# Altium PCB pcb.PcbDoc
Units mm, origin at the board's own origin, x right, y up, seen from the top; angles counter-clockwise.
Board outline 90 x 60 mm, 2 copper layers (Top Layer, Bottom Layer); 63 components, 67 nets, 255 pads, 257 vias.
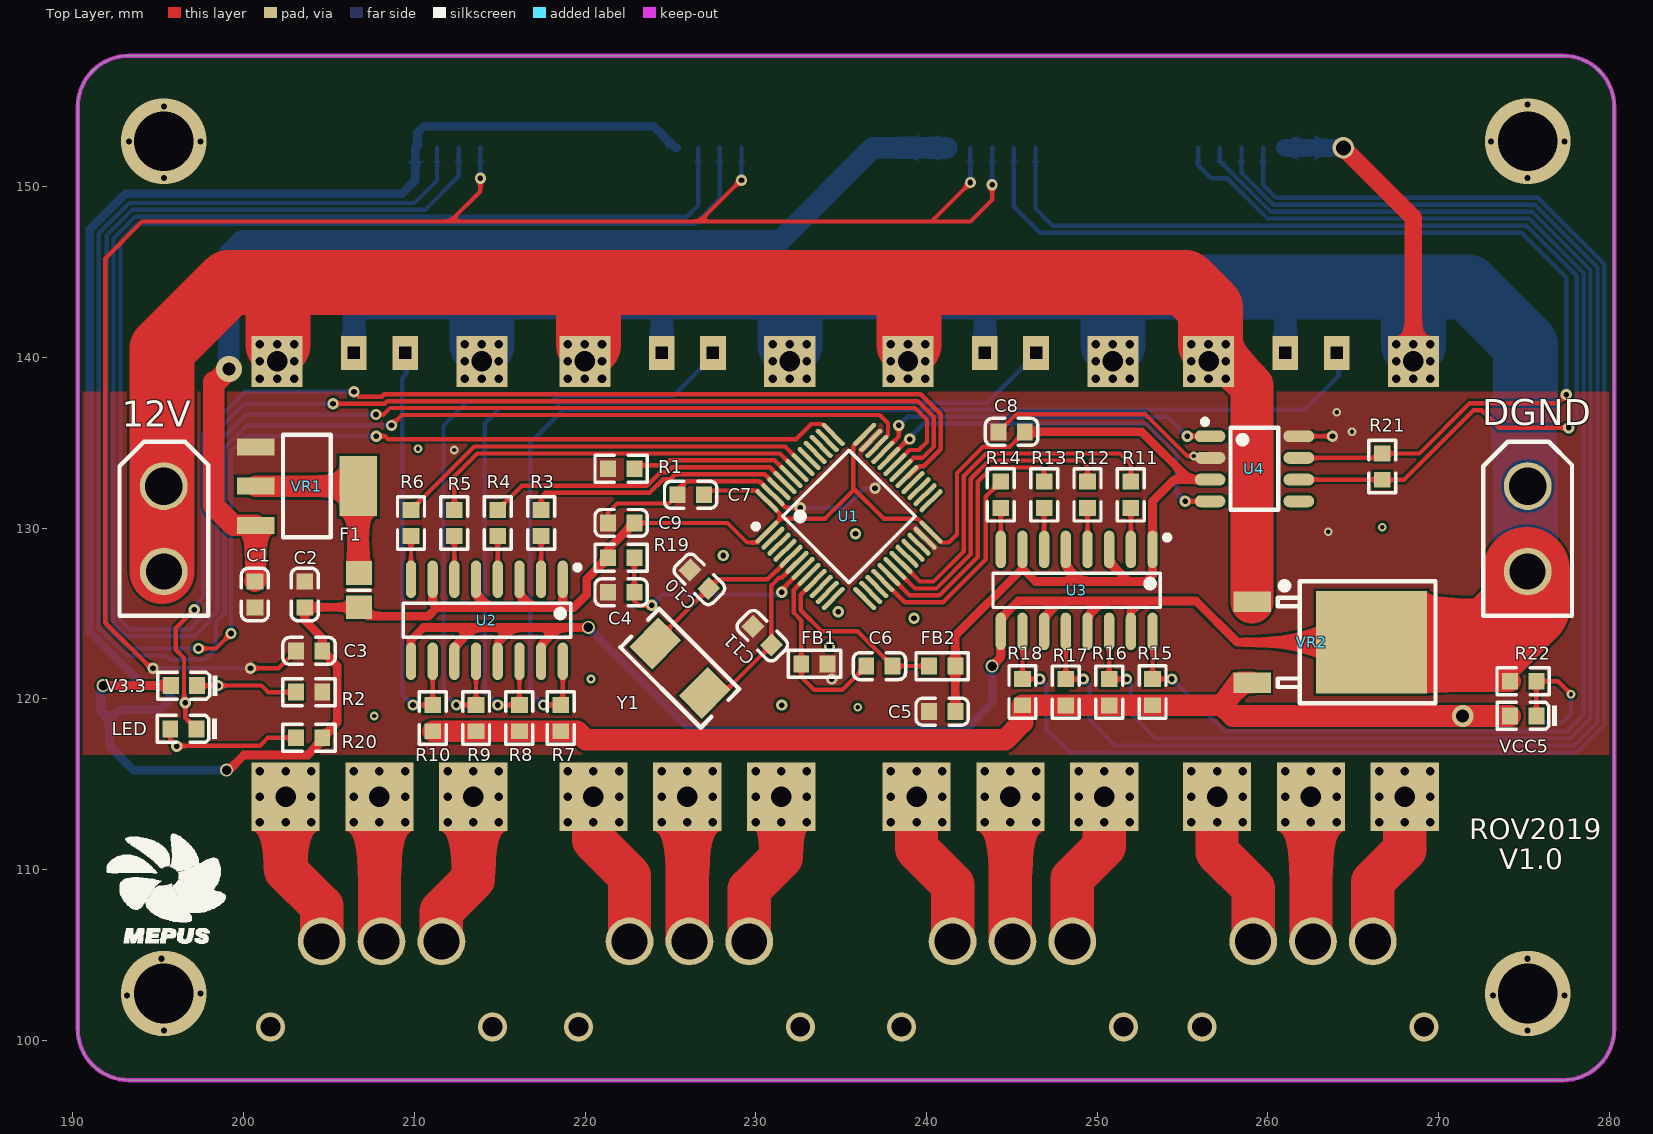
[diagram p0: Top Layer view]
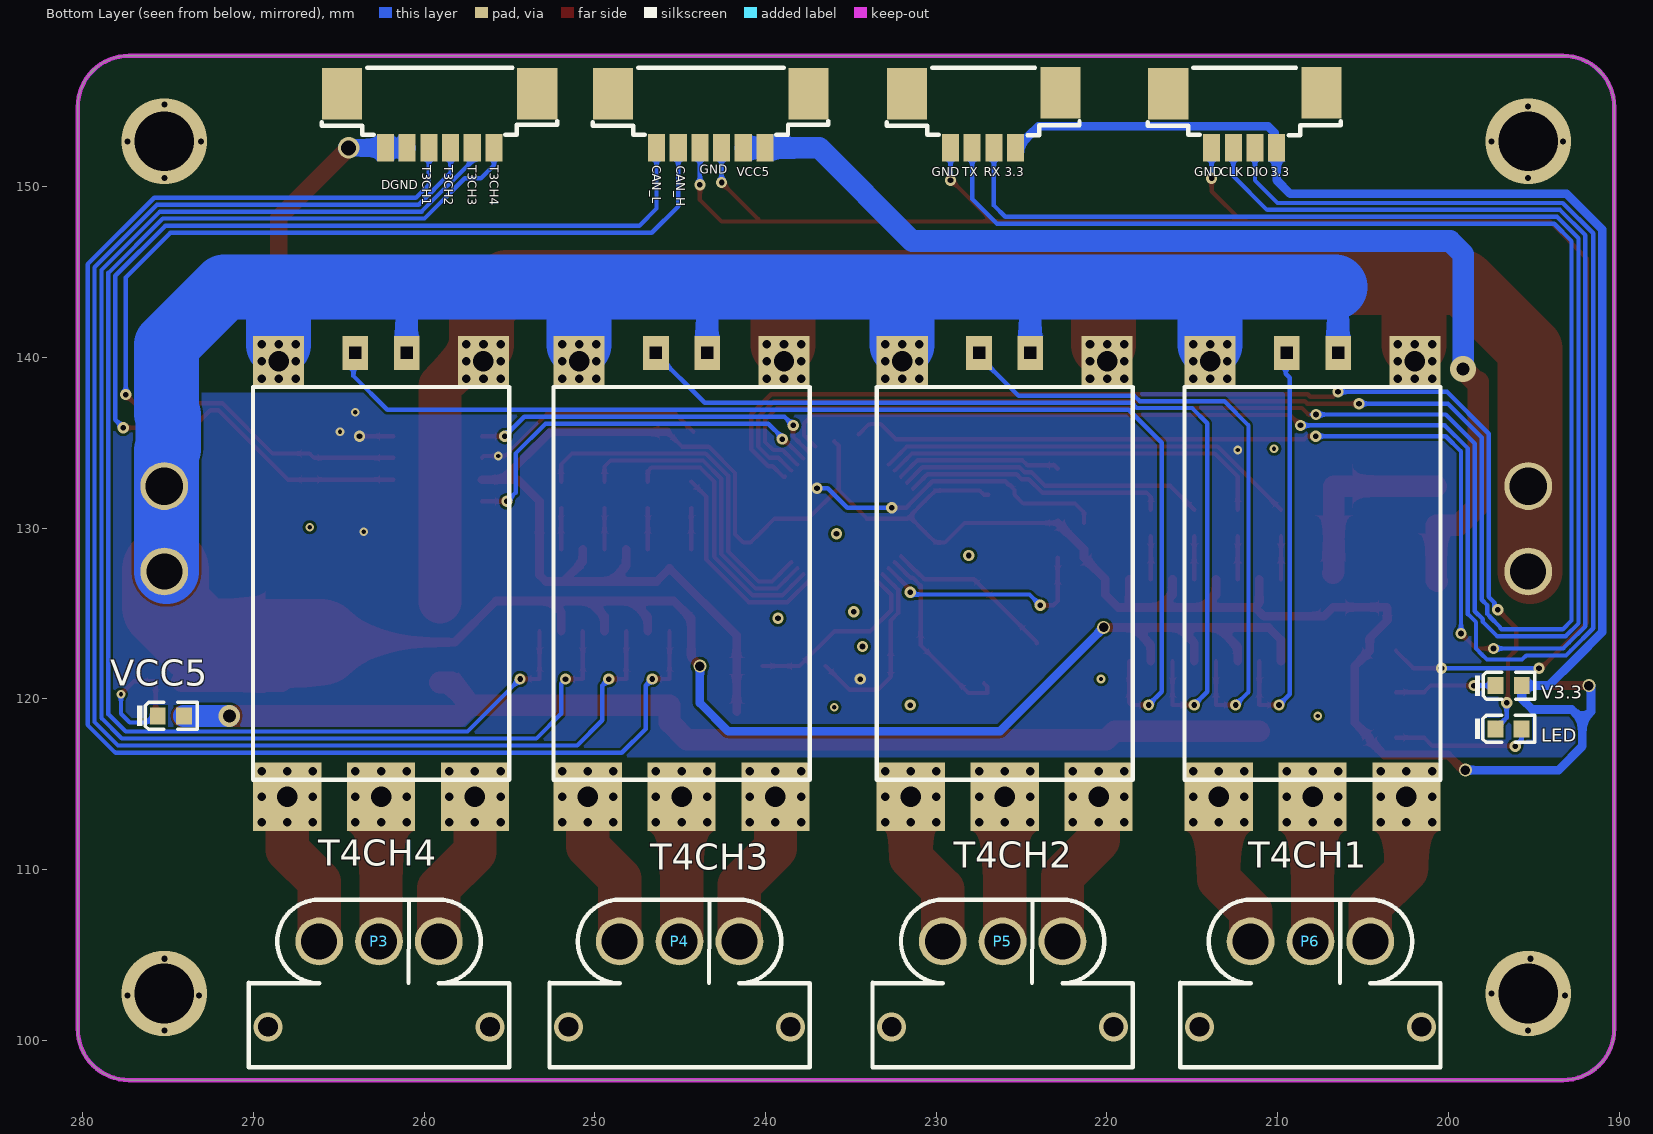
[diagram p1: Bottom Layer view, seen from below]
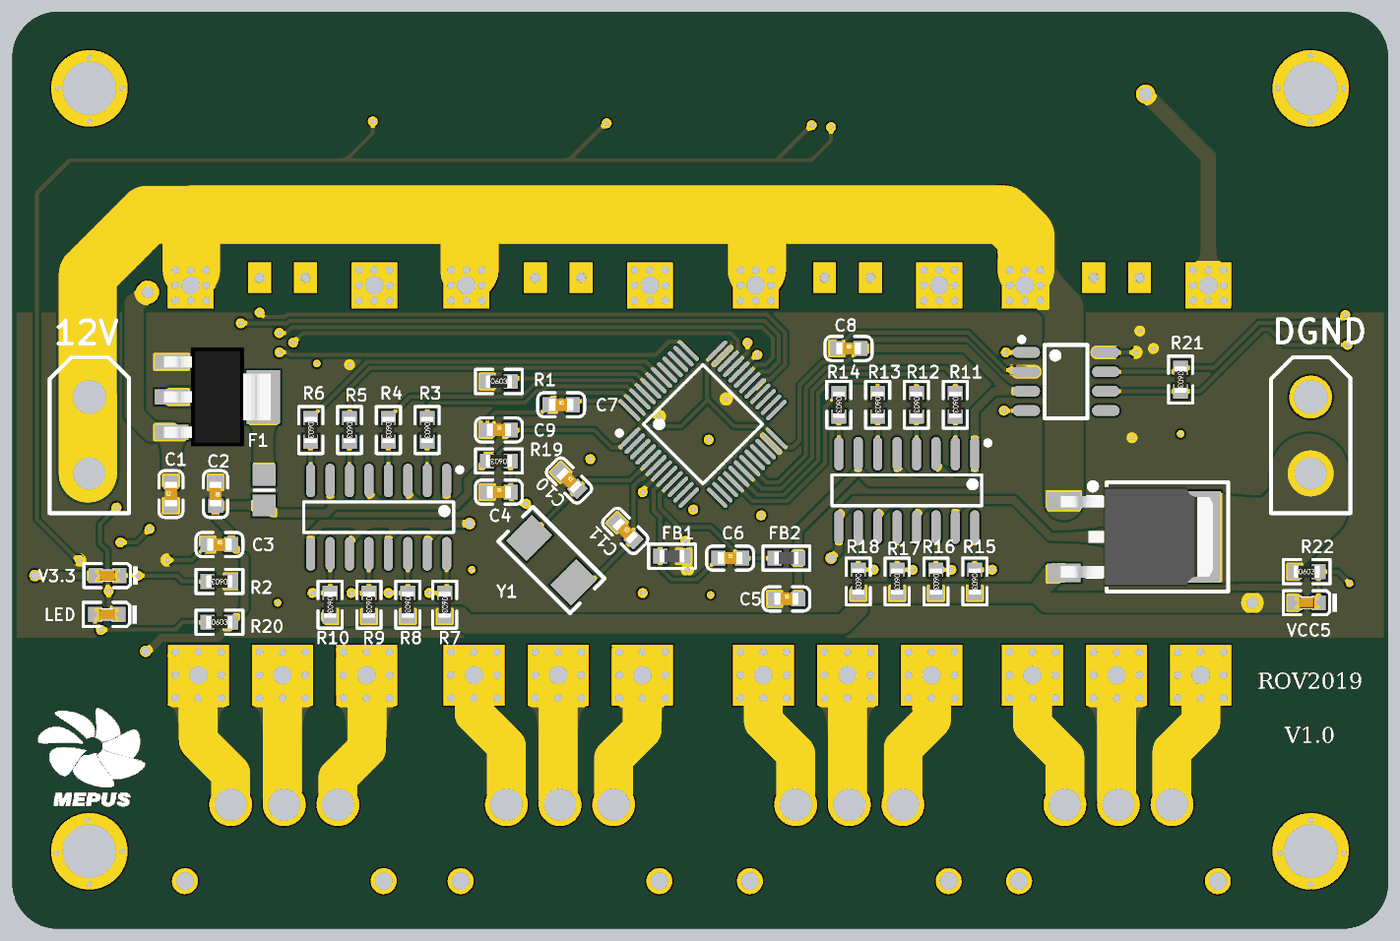
[diagram p2: 3D render of the assembled board from above, using the file's embedded part models]

## Layer stack, top to bottom
Top Solder: solder mask 0.0102, Solder Resist, Dk 3.5
Top Layer: signal copper 0.0356
Dielectric 1: dielectric 0.32, FR-4, Dk 4.8
Bottom Layer: signal copper 0.0356
Bottom Solder: solder mask 0.0102, Solder Resist, Dk 3.5

## Board outline
277.283,97.669 ccw(c277.283,100.669) 280.283,100.669 280.283,154.669 ccw(c277.283,154.669) 277.283,157.669 193.283,157.669 ccw(c193.283,154.669) 190.283,154.669 190.283,100.669 ccw(c193.283,100.669) 193.283,97.669

## Design rules (kind name [scope] priority, off if disabled: settings)
Clearance [All] p1: gap=0.152 ignorepadtopadclearanceinfootprint=FALSE except(0: Arc-Hole Track-Hole SMDPad-Hole THPad-Hole Via-Hole Fill-Hole Poly-Hole Region-Hole Text-Hole)
ComponentClearance [All] p1 off: gap=0.254 collisioncheckmode=3 verticalgap=0.254 showdistances=FALSE
HoleSize [All] p1: absolutevalues=TRUE maxlimit=5.08 minlimit=0.025 maxpercent=80.000 minpercent=20.000
PlaneConnect [All] p1: planeconnectstyle=Direct reliefexpansion=0.508 reliefentries=4 reliefconductorwidth=0.254 reliefairgap=0.254
PolygonConnect [All] p1: connectstyle=Direct reliefconductorwidth=0.254 reliefentries=4 polygonreliefangle="90 Angle" airgapwidth=0.254
RoutingVias [All] p1: holewidth=0.33 width=0.66 viastyle="Through Hole" minholewidth=0.025 minwidth=0.254 maxholewidth=2.54 maxwidth=2.54
SilkToSilkClearance [All] p1: silktosilkclearance=0.127
SolderMaskExpansion [All] p1: expansion=0.102
Width [All] p1: maxlimit=12.7 minlimit=0.254 preferedwidth=0.254
26 further rules are at their usual default settings.

## Classes and differential pairs
component class 原理图1: 12V C1 C2 C3 C4 C5 C6 C7 C8 C9 C10 C11 CAN_L CLK DGND F1 FB1 FB2 LED P3 P4 P5 P6 R1 R2 R3 R4 R5 R6 R7 R8 R9 R10 R11 R12 R13 R14 R15 R16 R17 R18 R19 R20 R21 R22 T3CH1 T4CH1 T4CH2 T4CH3 T4CH4 TX U1 U2 U3 U4 V3.3 VCC5 VR2 Y1

## Components (designator, comment, footprint, x,y, rotation, side; value= is the part's Value field where it differs from the comment)
12V "Header 2" "XT30 - 2" 195.326,127.461 r90 top (schematic designator P7)
C1 "10uF (106) 10% 50V" 0603_C 200.66,126.111 r90 top
C2 "10uF (106) 10% 50V" 0603_C 203.581,126.111 r270 top
C3 "100nF (104) 10% 50V" 0603_C 203.835,122.809 r0 top
C4 "100nF (104) 10% 50V" 0603_C 222.115,126.238 r0 top
C5 "100nF (104) 10% 50V" 0603_C 240.919,119.253 r0 top
C6 "100nF (104) 10% 50V" 0603_C 237.236,121.92 r0 top
C7 "100nF (104) 10% 50V" 0603_C 226.187,131.953 r0 top
C8 "100nF (104) 10% 50V" 0603_C 244.983,135.636 r0 top
C9 "100nF (104) 10% 50V" 0603_C 222.115,130.302 r0 top
C10 "22pF (220) 5% 50V" 0603_C 226.695,127 r315 top
C11 "22pF (220) 5% 50V" 0603_C 230.378,123.698 r315 top
CAN_L "Header 6" Modolex_6P 243.205,155.448 r0 bottom (schematic designator CAN1)
CLK "Header 4" Molex-4 210.721,154.596 r180 bottom (schematic designator P1)
DGND "Header 2" "XT30 - 2" 275.209,127.461 r90 top (schematic designator P8)
F1 "Fuse 1" 6-0805_M 206.756,126.365 r270 top
FB1 "600Ω ±25% 100MHz" 0603_L 233.434,122.047 r180 top
FB2 "600Ω ±25% 100MHz" 0603_L 240.919,121.92 r180 top
LED "蓝灯 0603" 0603_LED_S1 196.469,118.237 r180 top (schematic designator D5)
LED "蓝灯 0603" 0603_LED_S1 196.477,118.237 r180 bottom (schematic designator D3)
P3 "Motor1" 1 262.636,105.791 r0 bottom
P4 "Motor2" 1 245.034,105.791 r0 bottom
P5 "Motor3" 1 226.111,105.791 r0 bottom
P6 "Motor4" 1 208.077,105.791 r0 bottom
R1 "10KΩ (1002) ±1%" 0603_R 222.115,133.477 r0 top
R2 "1KΩ (1001) ±1%" 0603_R 203.835,120.396 r180 top
R3 "100Ω (1000) ±1%" 0603_R 217.424,130.302 r270 top
R4 "100Ω (1000) ±1%" 0603_R 214.884,130.302 r270 top
R5 "100Ω (1000) ±1%" 0603_R 212.344,130.302 r270 top
R6 "100Ω (1000) ±1%" 0603_R 209.804,130.302 r270 top
R7 "470Ω (4700) ±1%" 0603_R 218.567,118.872 r270 top
R8 "470Ω (4700) ±1%" 0603_R 216.154,118.872 r270 top
R9 "470Ω (4700) ±1%" 0603_R 213.614,118.872 r270 top
R10 "470Ω (4700) ±1%" 0603_R 211.074,118.872 r270 top
R11 "100Ω (1000) ±1%" 0603_R 251.968,131.953 r270 top
R12 "100Ω (1000) ±1%" 0603_R 249.428,131.953 r270 top
R13 "100Ω (1000) ±1%" 0603_R 246.888,131.953 r270 top
R14 "100Ω (1000) ±1%" 0603_R 244.348,131.953 r270 top
R15 "470Ω (4700) ±1%" 0603_R 253.238,120.396 r270 top
R16 "470Ω (4700) ±1%" 0603_R 250.698,120.388 r270 top
R17 "470Ω (4700) ±1%" 0603_R 248.158,120.388 r270 top
R18 "470Ω (4700) ±1%" 0603_R 245.618,120.396 r270 top
R19 "10KΩ (1002) ±1%" 0603_R 222.115,128.27 r180 top
R20 "1KΩ (1001) ±1%" 0603_R 203.835,117.729 r0 top
R21 "120Ω (1200) ±1%" 0603_R 266.7,133.604 r270 top
R22 "1KΩ (1001) ±1%" 0603_R 274.947,121.031 r0 top
T3CH1 "Header 6" Modolex_6P 259.08,155.448 r0 bottom (schematic designator CAN3)
T4CH1 "" HOBBYWING_WING20A/30A 207.957,127.762 r0 bottom locked (schematic designator M4)
T4CH2 "HOBBYWING_FPV" HOBBYWING_WING20A/30A 225.991,127.762 r0 bottom locked (schematic designator M3)
T4CH3 "HOBBYWING_FPV" HOBBYWING_WING20A/30A 244.914,127.762 r0 bottom locked (schematic designator M2)
T4CH4 "HOBBYWING_FPV" HOBBYWING_WING20A/30A 262.516,127.762 r0 bottom locked (schematic designator M1)
TX "Header 4" Molex-4 226.013,154.596 r180 bottom (schematic designator P2)
U1 "STM32F103C" LQFP-48_7x7x05P 235.458,130.683 r315 top
U2 "TLP291-4" LC-SOP-16_150mil 214.249,124.6 r180 top
U3 "TLP291-4" LC-SOP-16_150mil 248.793,126.352 r180 top
U4 "CAN/SN65HVD230DR" SOIC-8_150mil 259.207,133.477 r270 top
V3.3 "红灯 0603" 0603_LED_S1 196.507,120.777 r180 top (schematic designator D7)
V3.3 "红灯 0603" 0603_LED_S1 196.469,120.777 r180 bottom (schematic designator D2)
VCC5 "红灯 0603" 0603_LED_S1 274.955,118.999 r180 top (schematic designator D8)
VCC5 "红灯 0603" 0603_LED_S1 274.828,118.999 r180 bottom (schematic designator D4)
VR1 "AMS1117-3.3" SOT-223 203.708,132.461 r180 top
VR2 "L78M05ABDT-TR" TO-252-2-180 259.065,123.317 r0 top
Y1 "8MHz ±20ppm 20pF" SMD-5032_2P 225.552,121.793 r135 top

## Footprints (in the part's own frame and the unit in brackets; to place one, negate y for a bottom-side part, rotate by r counter-clockwise, add the part's x,y. Pads: shape width x height; smd on the part's side, far side on the other; paste and mask are expansions set on the pad)
1 [mm]
  round 2.8 hole 2.1: 1(-3.505,0) 2(0,0) 3(3.505,0)
  silkscreen extent -7.62,-2.45 7.62,7.37
6-0805_M [mm] "Chip Resistor, Body 2.0x1.2mm, IPC Low Density"
  rect 1.4x1.5 smd: 1(-1,0) 2(1,0)
  silkscreen extent 0,-0.65 0,0.65, body extent -1.07,-0.7 1.07,0.7, height 0.7
0603_C [mm]
  rect 0.93x0.98 smd: 1(-0.77,0) 2(0.77,0)
  silkscreen extent -1.53,-0.79 1.54,0.79, body extent -0.8,-0.4 0.8,0.4, height 0.3
0603_L [mm]
  rect 0.93x0.98 smd: 1(-0.77,0) 2(0.77,0)
  silkscreen extent -1.53,-0.79 1.54,0.79, body extent -0.82,-0.41 0.83,0.41, height 0.46
0603_LED_S1 [mm]
  rect 0.93x0.98 smd: A(0.77,0) K(-0.77,0)
  silkscreen extent -1.98,-0.79 1.54,0.79, body extent -0.8,-0.4 0.8,0.4, height 0.6
0603_R [mm]
  rect 0.93x0.98 smd: 1(-0.77,0) 2(0.77,0)
  silkscreen extent -1.53,-0.79 1.54,0.79, body extent -0.85,-0.4 0.85,0.4, height 0.56
HOBBYWING_WING20A/30A [mm]
  rect 3x3 hole 1.2: 1(-6,-12) 4(6,-12)
  rect 1.5x2 hole 0.7 square: 2(-1.5,-12.5) 3(1.5,-12.5)
  rect 4x4 hole 1.2: 5(5.5,13.5) 6(0,13.5) 7(-5.5,13.5)
  silkscreen extent -7.5,-10.5 7.5,12.5
LC-SOP-16_150mil [mm]
  oval 0.6x2.2 smd: 1(-4.445,-2.4) 2(-3.175,-2.4) 3(-1.905,-2.4) 4(-0.635,-2.4) 5(0.635,-2.4) 6(1.905,-2.4) 7(3.175,-2.4) 8(4.445,-2.4) 9(4.445,2.4) 10(3.175,2.4) 11(1.905,2.4) 12(0.635,2.4) 13(-0.635,2.4) 14(-1.905,2.4) 15(-3.175,2.4) 16(-4.445,2.4)
  silkscreen extent -5.45,-3.25 4.9,1
LQFP-48_7x7x05P [mm]
  oval 0.28x1.8 smd mask+0.051: 1(-2.75,-4.05) 2(-2.25,-4.05) 3(-1.75,-4.05) 4(-1.25,-4.05) 5(-0.75,-4.05) 6(-0.25,-4.05) 7(0.25,-4.05) 8(0.75,-4.05) 9(1.25,-4.05) 10(1.75,-4.05) 11(2.25,-4.05) 12(2.75,-4.05) 25(2.75,4.05) 26(2.25,4.05) 27(1.75,4.05) 28(1.25,4.05) 29(0.75,4.05) 30(0.25,4.05) 31(-0.25,4.05) 32(-0.75,4.05) 33(-1.25,4.05) 34(-1.75,4.05) 35(-2.25,4.05) 36(-2.75,4.05)
  oval 1.8x0.28 smd mask+0.051: 13(4.05,-2.75) 14(4.05,-2.25) 15(4.05,-1.75) 16(4.05,-1.25) 17(4.05,-0.75) 18(4.05,-0.25) 19(4.05,0.25) 20(4.05,0.75) 21(4.05,1.25) 22(4.05,1.75) 23(4.05,2.25) 24(4.05,2.75) 37(-4.05,2.75) 38(-4.05,2.25) 39(-4.05,1.75) 40(-4.05,1.25) 41(-4.05,0.75) 42(-4.05,0.25) 43(-4.05,-0.25) 44(-4.05,-0.75) 45(-4.05,-1.25) 46(-4.05,-1.75) 47(-4.05,-2.25) 48(-4.05,-2.75)
  silkscreen extent -3.6,-4.42 2.75,2.75
Modolex_6P [mm]
  rect 2.35x3 smd: 0(-5.715,0) 0(5.715,0)
  rect 1x1.6 smd: 1(3.175,3.175) 2(1.905,3.175) 3(0.635,3.175) 4(-0.635,3.175) 5(-1.905,3.175) 6(-3.175,3.175)
  silkscreen extent -6.88,-1.52 6.91,2.41
Molex-4 [mm]
  rect 2.35x3 smd: 0(-5.687,0.852) 0(3.3,0.901)
  rect 1x1.6 smd: 1(-3.147,-2.323) 2(-1.877,-2.323) 3(-0.607,-2.323) 4(0.663,-2.323)
  silkscreen extent -6.88,-1.58 4.41,2.38
SMD-5032_2P [mm]
  rect 1.9x2.4 smd: 1(-2.05,0) 2(2.05,0)
  silkscreen extent -3.33,-1.6 3.33,1.6
SOIC-8_150mil [mm]
  oval 0.7x1.8 smd: 1(-1.905,-2.6) 2(-0.635,-2.6) 3(0.635,-2.6) 4(1.905,-2.6) 5(1.905,2.6) 6(0.635,2.6) 7(-0.635,2.6) 8(-1.905,2.6)
  silkscreen extent -2.9,-3.05 2.4,1.4
SOT-223 [mm]
  rect 2.2x1 smd: 1(3,-2.3) 2(3,0) 3(3,2.3)
  rect 2.2x3.5 smd: 2(-3,0)
  silkscreen extent -1.4,-3 1.4,3, body extent -3.49,-3.24 3.49,3.24, height 1.64
TO-252-2-180 [mm]
  rect 2.2x1.2 smd: 1(0,2.361) 3(0.004,-2.361)
  rect 6.5x6 smd: 2(7,0)
  silkscreen extent 1.5,-3.57 10.75,3.57, body extent -0.2,-3.27 9.74,3.27, height 2.44
"XT30 - 2" [mm]
  round 2.8 hole 2.1: 1(0,0)
  round 2.8 hole 2.2: 2(5,0)
  silkscreen extent -2.6,-2.6 7.6,2.6

## Part data
12V DGND: "Header, 2-Pin"
C1 C2: library part "1206 10uF (106) 10% 50V", "贴片电容"
C3 C4 C5 C6 C7 C8 C9: library part "0603 100nF (104) 10% 50V", "贴片电容"
C10 C11: library part "0805 22pF (220) 5% 50V", "贴片电容"
CAN_L T3CH1: "Header, 6-Pin"
CLK TX: "Header, 4-Pin"
F1: "Fuse"
FB1 FB2: library part "0805 600Ω 25% 100MHz", "贴片磁珠"
LED LED: library part "0603 蓝灯", "发光二极管"
P3 P4 P5 P6: library part "Header 3", "Header, 3-Pin"
R1 R19: library part "0603 10KΩ (1002) 1%", "贴片电阻"
R2 R20 R22: library part "0603 1KΩ (1001) 1%", "贴片电阻"
R3 R4 R5 R6 R11 R12 R13 R14: library part "0603 100Ω (1000) 1%", "贴片电阻"
R7 R8 R9 R10 R15 R16 R17 R18: library part "0603 470Ω (4700) 1%", "贴片电阻"
R21: library part "0603 120Ω (1200) 1%", "贴片电阻"
T4CH1: library part HOBBYWING_FPV
U2 U3: library part TLP521-4
U4: library part CAN/SN65HVD230DR_[C12084], "CAN"
V3.3 V3.3 VCC5 VCC5: library part "0603 红灯", "发光二极管"
VR1: library part "SOT-223 AMS1117-3.3", "低压差线性稳压(LDO)"
VR2: library part "TO-252-2 L78M05ABDT-TR", "低压差线性稳压(LDO)"
Y1: library part "SMD-5032_2P 8MHz 20ppm 20pF", "贴片晶振"

## Free pads (board coordinates)
  round 5 hole 3.5: 2(195.326,102.743) 2(275.209,102.743)

## Via types
v1: diameter 1, hole 0.5, Top Layer to Bottom Layer, 168 vias
v2: diameter 0.66, hole 0.33, Top Layer to Bottom Layer, 43 vias
v3: diameter 0.635, hole 0.356, Top Layer to Bottom Layer, 16 vias
v4: diameter 0.508, hole 0.254, Top Layer to Bottom Layer, 11 vias
v5: diameter 1.7, hole 1.15, Top Layer to Bottom Layer, 8 vias
v6: diameter 0.762, hole 0.559, Top Layer to Bottom Layer, 4 vias
v7: diameter 5, hole 3.5, Top Layer to Bottom Layer, 4 vias
v8: diameter 1.27, hole 0.889, Top Layer to Bottom Layer, 1 vias
v9: diameter 1.27, hole 0.762, Top Layer to Bottom Layer, 1 vias
v10: diameter 1.524, hole 0.762, Top Layer to Bottom Layer, 1 vias

## Nets (pads, with @x,y where several pads share a name; then routed paths per layer and width w, separated by ;. In a path a pad name is that pad's centre, name@x,y a point inside that pad or via, vN(x,y) a via of type N, cw(c..) or ccw(c..) an arc to the next point about the centre after c; other vN are vias at no path point)
+12V: 12V.1 12V.2 T4CH1.1 T4CH2.1 T4CH3.1 T4CH4.1 VR2.1 | length 109.7
  Top Layer w0.254: T4CH1.1@202.026,139.762 T4CH1.1@202.026,140.762 ; 202.026,144.368 202.057,144.399 ; T4CH2.1@220.187,139.762 T4CH2.1@220.187,140.762 ; 220.187,144.114 220.472,144.399 ; T4CH3.1@238.983,139.762 T4CH3.1@238.983,140.762 ; 238.983,144.368 239.014,144.399
  Top Layer w2.54: T4CH4.1@256.636,140.762 259.065,138.333 VR2.1
  Top Layer w3.81: 12V.1@195.231,127.461 195.231,140.494 199.136,144.399 202.057,144.399 220.472,144.399 239.014,144.399 239.237,144.399 ; T4CH1.1@202.026,140.762 202.026,144.368 ; T4CH2.1@220.187,140.762 220.187,144.114 ; T4CH3.1@238.983,140.762 238.983,144.368 ; 239.237,143.683 239.237,144.399 ; T4CH4.1@256.636,140.762 256.636,142.906 255.143,144.399 239.237,144.399
  other v1: 200.957,138.762 201.957,138.762 202.957,138.762 218.991,138.762 219.991,138.762 220.991,138.762 237.914,138.762 238.914,138.762 239.914,138.762 255.516,138.762 256.516,138.762 257.516,138.762 200.957,139.762 202.957,139.762 218.991,139.762 220.991,139.762 237.914,139.762 239.914,139.762 255.516,139.762 257.516,139.762 200.957,140.762 201.957,140.762 202.957,140.762 218.991,140.762 219.991,140.762 220.991,140.762 237.914,140.762 238.914,140.762 239.914,140.762 255.516,140.762 256.516,140.762 257.516,140.762
CAN1_RX: U1.32 U4.4 | length 22.9
  Top Layer w0.254: U1.32 238.928,135.214 v2(239.014,135.214) ; v2(255.143,131.572) U4.4
  Bottom Layer w0.254: v2(239.014,135.214) 239.014,135.3 239.833,136.119 252.882,136.119 254.635,134.366 254.635,132.08 v2(255.143,131.572)
CAN1_TX: U1.33 U4.1 | length 20.9
  Top Layer w0.254: U1.33 238.379,135.372 v2(238.379,136.017) ; v2(255.27,135.382) U4.1
  Bottom Layer w0.254: v2(238.379,136.017) 238.887,136.525 254.127,136.525 v2(255.27,135.382)
CAN1H: CAN_L.2 R21.1 U4.7 | length 61.6
  Top Layer w0.254: U4.7 266.438,134.112 R21.1 268.867,134.374 271.805,137.312 276.962,137.312 v2(277.47,137.82)
  Bottom Layer w0.254: CAN_L.2 245.11,148.844 246.659,147.295 274.853,147.295 277.47,144.678 v2(277.47,137.82)
CAN1L: CAN_L.1 R21.2 U4.6 | length 64.1
  Top Layer w0.254: U4.6 266.692,132.842 R21.2 267.962,132.834 272.034,136.906 272.516,136.906 273.545,135.877 v2(277.622,135.877)
  Bottom Layer w0.254: CAN_L.1 246.38,148.717 247.396,147.701 275.158,147.701 278.079,144.78 278.079,136.347 v2@277.609,135.877 ; v2@277.47,135.738 v2@277.609,135.877 ; v2(277.622,135.877) v2@277.609,135.877
D_GND1: DGND.1 DGND.2 R22.1 T3CH1.1 T3CH1.2 T4CH1.2 T4CH1.4 T4CH2.2 T4CH2.4 T4CH3.2 T4CH3.4 T4CH4.2 T4CH4.4 U2.9 U2.11 U2.13 U2.15 U3.9 U3.11 U3.13 U3.15 VR2.2 | length 235.4
  Top Layer w0.254: VR2.2 VR2.2@268.351,121.031
  Top Layer w0.508: U2.9 209.804,123.444 210.541,124.181 213.487,124.181 ; U2.11 212.344,123.038 213.487,124.181 ; U2.13 214.884,123.292 215.773,124.181 ; U2.15 217.424,123.165 218.44,124.181 ; v6(220.193,124.181) 218.44,124.181 ; v6(243.84,121.92) 244.348,122.428 U3.9 244.348,124.714 245.364,125.73 247.84,125.73 ; U3.11 246.888,124.777 247.84,125.73 ; U3.13 249.428,124.841 250.317,125.73 ; U3.15 251.968,125.095 252.603,125.73 ; VR2.2 258.191,123.317 255.778,125.73 252.603,125.73 ; 213.487,124.181 215.773,124.181 ; 215.773,124.181 218.44,124.181 ; 247.84,125.73 250.317,125.73 ; 250.317,125.73 252.603,125.73
  Top Layer w1.016: v8(264.414,152.273) 268.516,148.171 v1(268.516,140.762) T4CH4.4
  Top Layer w1.27: VR2.2@268.351,121.031 R22.1
  Top Layer w5.08: VR2.2 273.05,123.317 275.145,125.412 DGND.1@275.145,127.525
  Bottom Layer w0.254: T4CH1.4@213.995,140.208 214.026,139.767 T4CH1.4@214.026,139.762 ; T4CH2.4@232.187,139.762 T4CH2.4@232.187,140.762 ; T4CH3.4@250.983,139.762 T4CH3.4@250.983,140.762 ; T4CH4.4@268.636,139.762 T4CH4.4@268.636,140.762
  Bottom Layer w0.508: v6(220.193,124.181) 226.263,118.11 242.189,118.11 243.84,119.761 v6(243.84,121.92)
  Bottom Layer w1.016: T3CH1.2 T3CH1.1 v8(264.414,152.273) v8@264.541,152.273
  Bottom Layer w1.27: v1(206.457,140.262) 206.457,143.947 206.629,144.12 ; v1(224.491,140.262) 224.491,144.074 224.536,144.12 ; v1(243.414,140.262) 243.414,144.074 243.459,144.12 ; 260.985,144.12 261.016,144.089 v1(261.016,140.262)
  Bottom Layer w3.81: 206.629,144.12 213.919,144.12 213.957,144.081 ; v1(213.957,140.762) 213.957,144.081 ; v1(231.991,140.762) 231.991,143.954 232.156,144.12 ; v1(250.914,140.762) 250.914,144.031 250.825,144.12 ; v1(268.516,140.762) 268.516,143.904 268.732,144.12 ; DGND.1@275.082,127.461 275.082,134.545 274.98,134.647 274.98,136.625 275.082,136.727 275.082,140.716 271.678,144.12 268.732,144.12 ; 213.957,144.081 213.995,144.12 224.536,144.12 232.156,144.12 ; 232.156,144.12 243.459,144.12 250.825,144.12 ; 250.825,144.12 260.985,144.12 268.732,144.12
  other v1: 212.957,138.762 213.957,138.762 214.957,138.762 230.991,138.762 231.991,138.762 232.991,138.762 249.914,138.762 250.914,138.762 251.914,138.762 267.516,138.762 268.516,138.762 269.516,138.762 212.957,139.762 214.957,139.762 230.991,139.762 232.991,139.762 249.914,139.762 251.914,139.762 267.516,139.762 269.516,139.762 212.957,140.762 214.957,140.762 230.991,140.762 232.991,140.762 249.914,140.762 251.914,140.762 267.516,140.762 269.516,140.762
DRIVING_CURRENT1: U1.15
GND: C1.1 C2.1 C3.1 C4.1 C5.1 C7.1 C8.1 C9.1 C10.1 C11.1 CAN_L.3 CAN_L.4 CLK.1 FB1.1 R1.1 R2.1 TX.1 U1.23 U1.35 U1.47 U4.2 U4.8 VR1.1 | length 140.2
  Top Layer w0.254: v2@194.691,121.92 194.437,121.92 191.897,124.46 191.897,145.796 194.056,147.955 212.09,147.955 ; v2(200.406,121.793) 202.049,121.793 C3.1 ; v2(213.868,150.495) 213.868,149.733 212.09,147.955 ; C9.1 221.345,130.921 221.869,131.445 224.909,131.445 C7.1 225.417,132.232 225.933,132.748 230.211,132.748 U1.47 231.768,131.191 v2(232.611,131.191) ; v2(229.16,150.368) 229.108,150.368 226.695,147.955 ; v2(242.57,150.241) 240.411,148.082 240.411,147.955 ; v2(243.84,150.114) 243.84,149.225 242.57,147.955 240.411,147.955 ; C8.1 245.237,136.66 252.822,136.66 255.261,134.221 v4(255.651,134.221) 256.498,134.221 U4.2 ; U4.8 v2(263.779,135.382) ; 212.09,147.955 226.695,147.955 ; 226.695,147.955 240.411,147.955
  Bottom Layer w0.254: v2(194.691,121.793) v2(200.406,121.793) ; v2(213.868,150.495) CLK.1 ; v2(229.16,150.368) TX.1 ; v2(232.611,131.191) 233.045,131.191 235.204,131.191 236.347,132.334 v2(236.982,132.334) ; v2(242.57,150.241) CAN_L.4 ; v2(243.84,150.114) CAN_L.3
  other v2: 234.442,121.158
  other v4: 263.525,129.794 212.344,134.572 264.922,135.636 264.033,136.779
LED: LED.K U1.29 | length 70.1
  Top Layer w0.254: v2(197.104,125.222) 196.023,124.141 196.023,122.874 196.507,122.39 196.507,119.85 v2(196.588,119.769) 196.588,118.888 LED.K@197.239,118.237 ; v2(206.463,137.983) 206.752,137.693 208.091,137.693 208.243,137.846 239.659,137.846 240.837,136.668 240.837,134.617 239.84,133.62 239.569,133.62 238.966,133.016 U1.29
  Bottom Layer w0.254: v2(196.588,119.769) 196.588,118.896 LED.K@197.247,118.237 ; v2(197.104,125.222) 197.307,125.425 197.307,125.643 197.637,125.973 197.637,135.525 197.63,135.533 200.08,137.983 v2(206.463,137.983) v2@206.63,138.151
M15: P6.3 T4CH1.5 | length 9.2
  Top Layer w2.54: P6.3 211.582,107.569 213.457,109.444 v1(213.457,112.762) T4CH1.5
  other v1: 211.957,112.762 214.957,112.762 211.957,114.262 214.957,114.262 211.957,115.762 213.457,115.762 214.957,115.762
M16: P6.2 T4CH1.6 | length 8.5
  Top Layer w2.54: P6.2@207.957,105.791 v1(207.957,112.762) T4CH1.6
  other v1: 206.457,112.762 209.457,112.762 206.457,114.262 209.457,114.262 206.457,115.762 207.957,115.762 209.457,115.762
M17: P6.1 T4CH1.7 | length 9.3
  Top Layer w2.54: T4CH1.7 v1(202.457,112.762) 202.457,109.963 204.572,107.848 P6.1
  other v1: 200.957,112.762 203.957,112.762 200.957,114.262 203.957,114.262 200.957,115.762 202.457,115.762 203.957,115.762
M25: P5.3 T4CH2.5 | length 9.2
  Top Layer w2.54: P5.3 229.616,108.839 231.491,110.714 v1(231.491,112.762) T4CH2.5
  other v1: 229.991,112.762 232.991,112.762 229.991,114.262 232.991,114.262 229.991,115.762 231.491,115.762 232.991,115.762
M26: P5.2 T4CH2.6 | length 8.5
  Top Layer w2.54: T4CH2.6 v1(225.991,112.762) 225.991,105.911 P5.2
  other v1: 224.491,112.762 227.491,112.762 224.491,114.262 227.491,114.262 224.491,115.762 225.991,115.762 227.491,115.762
M27: P5.1 T4CH2.7 | length 9.3
  Top Layer w2.54: T4CH2.7 v1(220.491,112.762) 220.491,111.741 222.606,109.626 P5.1
  other v1: 218.991,112.762 221.991,112.762 218.991,114.262 221.991,114.262 218.991,115.762 220.491,115.762 221.991,115.762
M35: P4.3 T4CH3.5 | length 9.2
  Top Layer w2.54: P4.3 248.539,109.474 250.414,111.349 v1(250.414,112.762) T4CH3.5
  other v1: 248.914,112.762 251.914,112.762 248.914,114.262 251.914,114.262 248.914,115.762 250.414,115.762 251.914,115.762
M36: P4.2 T4CH3.6 | length 8.5
  Top Layer w2.54: T4CH3.6 v1(244.914,112.762) 244.914,105.911 P4.2
  other v1: 243.414,112.762 246.414,112.762 243.414,114.262 246.414,114.262 243.414,115.762 244.914,115.762 246.414,115.762
M37: P4.1 T4CH3.7 | length 9.3
  Top Layer w2.54: T4CH3.7 v1(239.414,112.762) 239.414,111.233 241.529,109.118 P4.1
  other v1: 237.914,112.762 240.914,112.762 237.914,114.262 240.914,114.262 237.914,115.762 239.414,115.762 240.914,115.762
M45: P3.3 T4CH4.5 | length 9.2
  Top Layer w2.54: P3.3 266.141,109.296 268.016,111.171 v1(268.016,112.762) T4CH4.5
  other v1: 266.516,112.762 269.516,112.762 266.516,114.262 269.516,114.262 266.516,115.762 268.016,115.762 269.516,115.762
M46: P3.2 T4CH4.6 | length 8.5
  Top Layer w2.54: T4CH4.6 v1(262.516,112.762) 262.516,105.911 P3.2
  other v1: 261.016,112.762 264.016,112.762 261.016,114.262 264.016,114.262 261.016,115.762 262.516,115.762 264.016,115.762
M47: P3.1 T4CH4.7 | length 7.8
  Top Layer w2.54: v1(257.016,112.762) 257.016,111.03 259.131,108.915 P3.1
  other v1: 255.516,112.762 258.516,112.762 255.516,114.262 258.516,114.262 255.516,115.762 257.016,115.762 258.516,115.762
NetD2_K: R2.2 V3.3.K | length 7.2
  Top Layer w0.254: V3.3.K@197.277,120.777 v2(198.501,120.777) 201.041,120.777 201.422,120.396 R2.2
  Bottom Layer w0.254: V3.3.K@197.239,120.777 v2(198.501,120.777)
NetD3_A: LED.A R20.1 | length 9.5
  Top Layer w0.254: LED.A@195.699,118.237 195.699,117.61 v2(196.088,117.221) 196.113,117.246 200.939,117.246 201.422,117.729 R20.1
  Bottom Layer w0.254: LED.A@195.707,118.237 195.707,117.602 v2(196.088,117.221)
NetD4_K: R22.2 VCC5.K | length 8
  Top Layer w0.254: VCC5.K@275.725,118.999 275.717,119.007 R22.2 276.987,121.031 v4(277.749,120.269)
  Bottom Layer w0.254: VCC5.K@275.598,118.999 275.844,118.999 276.225,118.618 277.241,118.618 277.749,119.126 v4(277.749,120.269)
NetF1_1: F1.1 VR1.2 | length 11.1
  Top Layer w1.27: VR1.2@200.708,132.461 206.708,132.461 206.708,127.413 F1.1
NetR1_2: R1.2 U1.44 | length 9.8
  Top Layer w0.254: R1.2 223.116,133.708 223.143,133.68 224.659,133.68 224.945,133.967 231.113,133.967 U1.44
NetR3_2: R3.2 U2.2 | length 2.5
  Top Layer w0.254: U2.2 R3.2
NetR4_2: R4.2 U2.4 | length 2.5
  Top Layer w0.254: U2.4 R4.2
NetR5_2: R5.2 U2.6 | length 2.5
  Top Layer w0.254: U2.6 R5.2
NetR6_2: R6.2 U2.8 | length 2.5
  Top Layer w0.254: U2.8 R6.2
NetR11_2: R11.2 U3.2 | length 2.4
  Top Layer w0.254: U3.2 R11.2
NetR12_2: R12.2 U3.4 | length 2.4
  Top Layer w0.254: U3.4 R12.2
NetR13_2: R13.2 U3.6 | length 2.4
  Top Layer w0.254: U3.6 R13.2
NetR14_2: R14.2 U3.8 | length 2.4
  Top Layer w0.254: U3.8 R14.2
NRST: C4.2 R19.1 U1.7 | length 13.5
  Top Layer w0.254: R19.1 C4.2 222.885,125.73 223.139,125.476 v2(223.901,125.476) ; v2(231.521,126.238) 231.521,126.392 U1.7
  Bottom Layer w0.254: v2(223.901,125.476) 224.536,126.111 231.24,126.111 231.367,126.238 v2(231.521,126.238)
OSC_IN: C10.2 U1.5 Y1.2 | length 10.1
  Top Layer w0.254: Y1.2 224.102,123.318 C10.2 227.784,127 230.692,127 231.2,127.508 231.222,127.508 U1.5
OSC_OUT: C11.2 U1.6 Y1.1 | length 11.3
  Top Layer w0.254: Y1.1@227.203,120.904 227.002,120.703 Y1.1 228.112,120.343 C11.2 230.911,123.165 230.911,126.645 231.368,127.102 231.523,127.102 U1.6
PWM_M1: R10.1 T4CH1.3 U2.10 | length 25
  Top Layer w0.254: v2(209.923,119.642) R10.1 U2.10
  Bottom Layer w0.254: T4CH1.3@209.296,140.032 209.526,140.262 209.526,139.041 209.296,138.811 209.296,120.269 v2(209.923,119.642)
  other v1: 209.457,140.262
PWM_M2: R9.1 T4CH2.3 U2.12 | length 38.1
  Top Layer w0.254: v2(212.463,119.642) R9.1 U2.12
  Bottom Layer w0.254: v2(212.463,119.642) 211.709,120.396 211.709,136.017 213.131,137.439 218.078,137.439 218.383,137.744 225.169,137.744 T4CH2.3@227.687,140.262
  other v1: 227.491,140.262
PWM_M3: R8.1 T4CH3.3 U2.14 | length 54.7
  Top Layer w0.254: v2(214.892,119.642) R8.1 U2.14
  Bottom Layer w0.254: v2(214.892,119.642) 214.122,120.412 214.122,136.144 215.011,137.033 218.246,137.033 218.551,137.338 243.559,137.338 T4CH3.3@246.483,140.262
  other v1: 246.414,140.262
PWM_M4: R7.1 T4CH4.3 U2.16 | length 69.6
  Top Layer w0.254: v2(217.559,119.642) R7.1 218.694,119.769 U2.16
  Bottom Layer w0.254: v2(217.559,119.642) 216.789,120.412 216.789,135.001 218.719,136.931 262.153,136.931 264.136,138.914 T4CH4.3@264.136,140.262
  other v1: 264.016,140.262
PWM_M5: R15.1 T3CH1.6 U3.16 | length 81.8
  Top Layer w0.254: U3.16 R15.1 v2(254.373,121.166)
  Bottom Layer w0.254: v2(254.373,121.166) 257.454,118.085 277.47,118.085 278.486,119.101 278.486,144.948 275.301,148.133 259.972,148.133 257.61,150.495 256.667,150.495 255.905,151.257 T3CH1.6
PWM_M6: R16.1 T3CH1.5 U3.14 | length 85.3
  Top Layer w0.254: U3.14 R16.1 v2(251.714,121.158)
  Bottom Layer w0.254: v2(251.714,121.158) 251.968,120.904 251.968,119.126 253.416,117.678 277.698,117.678 278.892,118.872 278.892,145.116 275.469,148.539 260.14,148.539 257.175,151.505 T3CH1.5
PWM_M7: R17.1 T3CH1.4 U3.12 | length 88.5
  Top Layer w0.254: U3.12 R17.1 v2(249.174,121.158)
  Bottom Layer w0.254: v2(249.174,121.158) 249.555,120.777 249.555,118.745 251.028,117.272 277.927,117.272 279.298,118.643 279.298,145.285 275.638,148.946 260.309,148.946 258.445,150.809 T3CH1.4
PWM_M8: R18.1 T3CH1.3 U3.10 | length 91.9
  Top Layer w0.254: R18.1 v2(246.626,121.166) ; R18.1@245.618,121.174 U3.10
  Bottom Layer w0.254: v2(246.626,121.166) 247.015,120.777 247.015,118.237 248.412,116.84 278.054,116.84 278.079,116.865 278.095,116.865 279.705,118.475 279.705,145.453 275.806,149.352 260.477,149.352 259.715,150.114 T3CH1.3
REF_SENSE1: U1.14
SWCLK: CLK.2 U1.37 | length 101.8
  Top Layer w0.254: v2(197.358,122.949) 198.387,122.949 v2(199.263,123.825) ; v2(207.772,135.382) 208.28,135.382 208.448,135.214 232.369,135.214 233.25,136.095 233.822,136.095 233.843,136.073 233.957,136.073 U1.37
  Bottom Layer w0.254: v2(197.358,122.949) 193.281,122.949 192.964,123.266 192.957,123.266 191.973,124.25 191.973,147.149 193.465,148.641 210.617,148.641 212.598,150.622 CLK.2 ; v2(199.263,123.825) 199.263,134.493 200.152,135.382 v2(207.772,135.382)
SWDIO: CLK.3 U1.34 | length 107.5
  Top Layer w0.254: v2(208.661,136.017) 209.271,136.627 237.261,136.627 237.744,136.144 237.744,135.444 U1.34
  Bottom Layer w0.254: v2(208.661,136.017) 200.212,136.017 198.857,134.661 198.857,124.963 198.387,124.493 198.387,122.949 198.043,122.605 197.739,122.301 195.683,122.301 195.442,122.542 193.113,122.542 192.795,122.86 192.789,122.86 191.516,124.133 191.516,147.266 193.297,149.047 210.007,149.047 211.328,150.368 CLK.3
TIM2_CH1: U1.10
TIM2_CH2: U1.11
TIM2_CH3: U1.12
TIM2_CH4: U1.13
TIM3_CH1: R14.1 U1.16 | length 12.5
  Top Layer w0.254: U1.16 238.719,125.654 240.97,125.654 243.459,128.143 243.459,131.834 R14.1
TIM3_CH2: R13.1 U1.17 | length 16
  Top Layer w0.254: U1.17 239.02,126.06 240.748,126.06 243.002,128.314 243.002,132.727 243.828,133.553 246.685,133.553 246.888,133.35 R13.1
TIM3_CH3: R12.1 U1.18 | length 18.5
  Top Layer w0.254: U1.18 239.321,126.467 240.579,126.467 242.595,128.483 242.595,132.895 243.66,133.96 249.072,133.96 249.428,133.604 R12.1
TIM3_CH4: R11.1 U1.19 | length 20.9
  Top Layer w0.254: U1.19 239.622,126.873 240.411,126.873 242.189,128.651 242.189,133.064 243.491,134.366 251.333,134.366 251.968,133.731 R11.1
TIM4_CH1: R6.1 U1.42 | length 24.9
  Top Layer w0.254: R6.1 213.512,134.78 231.715,134.78 U1.42
TIM4_CH2: R5.1 U1.43 | length 23
  Top Layer w0.254: R5.1 212.344,133.037 213.68,134.373 231.414,134.373 U1.43
TIM4_CH3: R4.1 U1.45 | length 18.2
  Top Layer w0.254: R4.1 216.298,132.486 223.626,132.486 224.413,133.274 224.827,133.274 225.114,133.561 230.813,133.561 U1.45
TIM4_CH4: R3.1 U1.46 | length 15.6
  Top Layer w0.254: R3.1 217.424,131.826 217.678,132.08 223.794,132.08 224.581,132.867 224.995,132.867 225.282,133.154 230.512,133.154 U1.46
U1_RX: TX.3 U1.31 | length 124.7
  Top Layer w0.254: v2(207.752,136.652) 208.199,136.652 208.58,137.033 239.322,137.033 240.024,136.331 240.024,135.047 239.549,134.572 238.994,134.572 U1.31
  Bottom Layer w0.254: v2@207.645,136.759 v2(207.752,136.652) ; v2@208.001,136.652 v2(207.752,136.652) ; TX.3 226.62,148.896 225.958,148.234 193.634,148.234 192.38,146.98 192.38,124.419 193.126,123.673 197.145,123.673 197.98,124.508 197.98,124.661 198.45,125.131 198.45,134.95 200.152,136.652 v2(207.752,136.652)
U1_TX: TX.2 U1.30 | length 125.3
  Top Layer w0.254: v2(205.232,137.287) 208.259,137.287 208.411,137.439 239.49,137.439 240.43,136.5 240.43,134.785 239.757,134.112 239.241,134.112 U1.30
  Bottom Layer w0.254: v2(205.232,137.287) 200.025,137.287 198.044,135.306 198.044,125.805 197.714,125.475 197.714,124.969 197.574,124.83 197.574,124.803 196.977,124.206 196.977,124.169 196.887,124.079 193.294,124.079 192.786,124.587 192.786,146.812 193.802,147.828 226.441,147.828 227.89,149.277 TX.2
VCC3.3: C2.2 C3.2 C5.2 C7.2 C8.2 C9.2 CLK.4 F1.2 FB2.1 R19.2 R20.2 TX.4 U1.1 U1.24 U1.36 U1.48 U2.1 U2.3 U2.5 U2.7 U3.1 U3.3 U3.5 U3.7 U4.3 V3.3.A | length 214.7
  Top Layer w0.254: C9.2 228.346,130.302 229.489,129.159 230.045,129.159 U1.1 231.569,130.683 ; C7.2 227.203,131.953 227.457,132.207 230.045,132.207 U1.48 231.569,130.683 ; U1.36@235.966,135.08 235.712,134.826 235.712,132.334 ; C8.2 244.889,134.772 243.323,134.772 241.783,133.232 241.783,129.642 241.3,129.159 240.871,129.159 U1.24 239.474,130.556 237.49,130.556 235.712,132.334 ; 231.569,130.683 231.696,130.556 234.061,130.556 235.712,132.207 235.712,132.334
  Top Layer w0.508: v6(191.77,120.777) V3.3.A@195.737,120.777 ; v6(199.009,115.824) 199.136,115.824 200.025,116.713 203.753,116.713 204.605,117.565 R20.2 205.486,118.61 205.486,121.928 C3.2 204.605,123.563 203.581,124.587 C2.2 203.605,125.365 F1.2 207.28,124.841 210.82,124.841 211.328,125.349 ; U2.7 211.074,125.603 211.328,125.349 ; U2.5 213.614,126.111 214.376,125.349 ; U2.3 216.154,126.111 216.916,125.349 ; U2.1 218.694,125.476 218.567,125.349 ; C9.2 221.345,128.762 R19.2 220.091,127.016 220.091,126.111 219.329,125.349 218.567,125.349 ; C5.2 FB2.1 241.689,123.706 245.618,127.635 246.38,126.873 249.047,126.873 ; C8.2 252.603,135.636 255.397,132.842 ; U3.5 248.158,127.762 249.047,126.873 ; U3.3 250.698,128.016 251.714,127 251.714,126.873 ; U4.3 255.397,132.842 ; 211.328,125.349 214.376,125.349 ; 214.376,125.349 216.916,125.349 ; 216.916,125.349 218.567,125.349 ; 249.047,126.873 251.714,126.873 ; 251.714,126.873 252.857,126.873 253.238,127.254 U3.1 253.238,131.572 254.508,132.842 255.397,132.842
  Bottom Layer w0.508: v6(191.77,120.777) 191.643,120.777 191.643,119.253 192.151,118.745 ; v6(199.009,115.824) 193.548,115.824 192.151,117.221 192.151,118.745 ; TX.4 225.277,152.273 224.008,153.542 210.565,153.542 210.185,153.162 210.185,152.4 CLK.4 210.058,150.368 209.271,149.581 193.076,149.581 190.983,147.487 190.983,123.912 192.568,122.326 192.575,122.326 194.124,120.777 195.699,120.777 195.699,120.007 195.072,119.38 192.786,119.38 192.151,118.745
VCC5: C1.2 CAN_L.5 CAN_L.6 VR1.3 | length 66
  Top Layer w1.27: v10(199.136,139.319) 198.374,138.557 198.247,138.557 198.247,131.318 199.404,130.161 VR1.3 200.708,126.929 C1.2
  Bottom Layer w1.27: v10(199.136,139.319) 199.136,146.05 199.898,146.812 231.394,146.812 236.855,152.273 CAN_L.6 CAN_L.5@241.173,152.273
VCC5_D: R7.2 R8.2 R9.2 R10.2 R15.2 R16.2 R17.2 R18.2 VCC5.A VR2.3 | length 70.1
  Top Layer w0.254: R17.2@248.15,119.626 R17.2 ; R15.2@253.23,119.618 R15.2 ; 257.294,119.626 257.302,119.634
  Top Layer w1.27: R10.2 R8.2 R7.2 219.546,118.102 220.046,117.602 244.602,117.602 245.618,118.618 R18.2 R17.2@248.15,119.626 ; R17.2 R16.2 R15.2@253.23,119.618 ; R15.2 257.294,119.626 ; VR2.3 258.392,120.956 257.302,119.634 257.937,118.999 v9(271.399,118.999) VCC5.A@274.185,118.999
  Bottom Layer w1.27: v9(271.399,118.999) VCC5.A@274.058,118.999
VDDA: C6.2 FB2.2 U1.9 | length 11
  Top Layer w0.254: U1.9 232.637,126.094 232.637,125.195 233.879,123.952 235.974,123.952 C6.2 FB2.2
VSSA: C6.1 FB1.2 U1.8 | length 11.3
  Top Layer w0.254: U1.8 232.23,126.395 232.23,125.026 232.664,124.592 FB1.2 232.664,121.285 233.426,120.523 235.069,120.523 C6.1
pads on no net: CAN_L.0 CLK.0 T3CH1.0 TX.0 U1.2 U1.3 U1.4 U1.20 U1.21 U1.22 U1.25 U1.26 U1.27 U1.28 U1.38 U1.39 U1.40 U1.41 U4.5
copper on no net:
  other v2: 231.521,119.634 234.315,123.063 239.268,124.714 234.823,125.095 228.092,128.397 235.839,129.667
  other v3: 195.326,100.584 275.209,100.584 193.167,102.616 273.177,102.616 277.368,102.616 197.485,102.743 195.199,104.775 275.209,104.775 195.326,150.495 275.209,150.495 193.294,152.654 197.485,152.654 273.05,152.654 277.368,152.654 195.326,154.686 275.209,154.813
  other v4: 207.645,118.999 235.966,119.507 220.345,121.158 266.7,130.048 210.21,134.653
  other v5: 201.577,100.791 214.577,100.791 219.611,100.791 232.611,100.791 238.534,100.791 251.534,100.791 256.136,100.791 269.136,100.791
  other v7: 195.326,102.743 275.209,102.743 195.326,152.654 275.209,152.654

## Polygon pours and split planes (outlines as drawn)
GND on Top Layer "Top Layer-GND" (solid, remove dead copper, pour order 14): 186.69,138.938 186.563,138.811 186.563,116.713 289.306,116.713 288.417,117.602 288.417,137.983 186.69,137.983
GND on Bottom Layer "Bottom Layer-GND" (solid, remove dead copper, pour order 16): 186.817,137.983 186.69,137.856 186.69,116.586 288.671,116.586 288.671,137.922

## Keep-outs
Keep-Out Layer:
  lines w0.254: 190.283,100.669 ccw(c193.283,100.669) 193.283,97.669 277.283,97.669 ccw(c277.283,100.669) 280.283,100.669 280.283,154.669 ccw(c277.283,154.669) 277.283,157.669 193.283,157.669 ccw(c193.283,154.669) 190.283,154.669 190.283,100.669

## Silkscreen, mask and mechanical layers (free items; w line width, h text height)
Top Overlay:
  drawing of 772 lines, arcs and shapes, not listed
  text "ROV2019" at 271.78,111.379 h2.03
  text "V1.0" at 273.558,109.601 h2.03
Bottom Overlay:
  text "T3CH4" at 256.159,151.257 h0.51 r90
  text "T3CH3" at 257.428,151.252 h0.51 r90
  text "T3CH2" at 258.826,151.257 h0.51 r90
  text "CAN_H" at 245.237,151.222 h0.51 r90
  text "GND" at 243.84,150.749 h0.51
  text "3.3" at 210.439,150.622 h0.51
  text "DIO" at 211.836,150.622 h0.51
  text "GND" at 214.884,150.622 h0.51
  text "3.3" at 225.991,150.622 h0.51
  text "RX" at 227.203,150.622 h0.51
  text "GND" at 230.251,150.622 h0.51
  text "VCC5" at 241.681,150.622 h0.51
  text "DGND" at 262.509,149.86 h0.51
Top Solder:
  lines w2.54: 202.438,109.85 202.438,112.649 ; 202.457,109.963 204.572,107.848 204.572,105.791 ; 202.457,112.762 202.457,114.262 ; 207.957,105.791 207.957,112.762 ; 211.582,105.791 211.582,107.569 ; 211.612,107.599 213.487,109.474 213.487,112.792 ; 220.472,112.781 220.472,111.76 222.587,109.645 ; 222.606,105.918 222.606,109.753 ; 225.991,105.911 225.991,112.762 ; 229.616,105.791 229.616,108.839 ; 229.646,108.869 231.521,110.744 ; 231.491,110.714 231.491,112.762 ; 239.395,112.908 239.395,111.252 241.529,109.118 241.529,105.791 ; 244.914,105.911 244.914,112.762 ; 248.569,105.821 248.569,109.504 250.444,111.379 250.414,112.762 ; 257.016,112.762 257.016,111.03 259.131,108.915 259.131,105.791 ; 262.516,105.911 262.516,112.762 ; 266.141,105.791 266.141,109.296 268.016,111.171 268.016,112.762
  lines w3.81: 195.199,132.429 195.199,140.462 199.104,144.367 202.025,144.367 ; 195.231,127.461 195.231,132.461 ; 201.957,140.762 201.957,144.368 ; 202.057,144.399 220.472,144.399 239.014,144.399 255.143,144.399 ; 220.218,140.589 220.218,144.195 ; 239.014,140.539 239.014,144.145 ; 255.047,144.495 256.54,143.002 256.54,140.858
Bottom Solder:
  lines w3.81: 206.629,144.145 217.17,144.145 ; 213.957,140.778 213.957,143.92 ; 216.916,144.145 224.282,144.145 245.491,144.145 ; 231.991,140.762 231.991,143.904 ; 243.459,144.145 250.825,144.145 ; 250.914,140.762 250.914,143.904 ; 251.587,144.12 261.747,144.12 ; 260.858,144.12 268.605,144.12 ; 268.351,144.12 271.551,144.12 274.955,140.716 ; 268.516,140.762 268.516,143.904 ; 275.209,127.461 275.209,132.461 275.209,140.716
Mechanical 1:
  lines w0.254: 190.283,100.33 190.283,154.94 ; 190.283,100.669 ccw(c193.283,100.669) 193.283,97.669 ; 190.283,154.669 cw(c193.283,154.669) 193.283,157.669 ; 192.913,97.669 277.58,97.669 277.622,97.711 ; 193.04,157.669 277.749,157.669 ; 277.283,97.711 ccw(c277.283,100.711) 280.283,100.711 ; 277.283,157.669 cw(c277.283,154.669) 280.283,154.669 280.289,154.663 280.289,100.457